# Altium PCB betterfc_v0.3.PcbDoc
Units mm, origin at the board's own origin, x right, y up, seen from the top; angles counter-clockwise.
Board outline 26 x 26 mm, 4 copper layers (Top Layer, Layer 1, Layer 2, Bottom Layer), stack 0.603 mm thick; 77 components, 53 nets, 263 pads, 0 vias.
Unrouted connection lines stored in the file: 115.
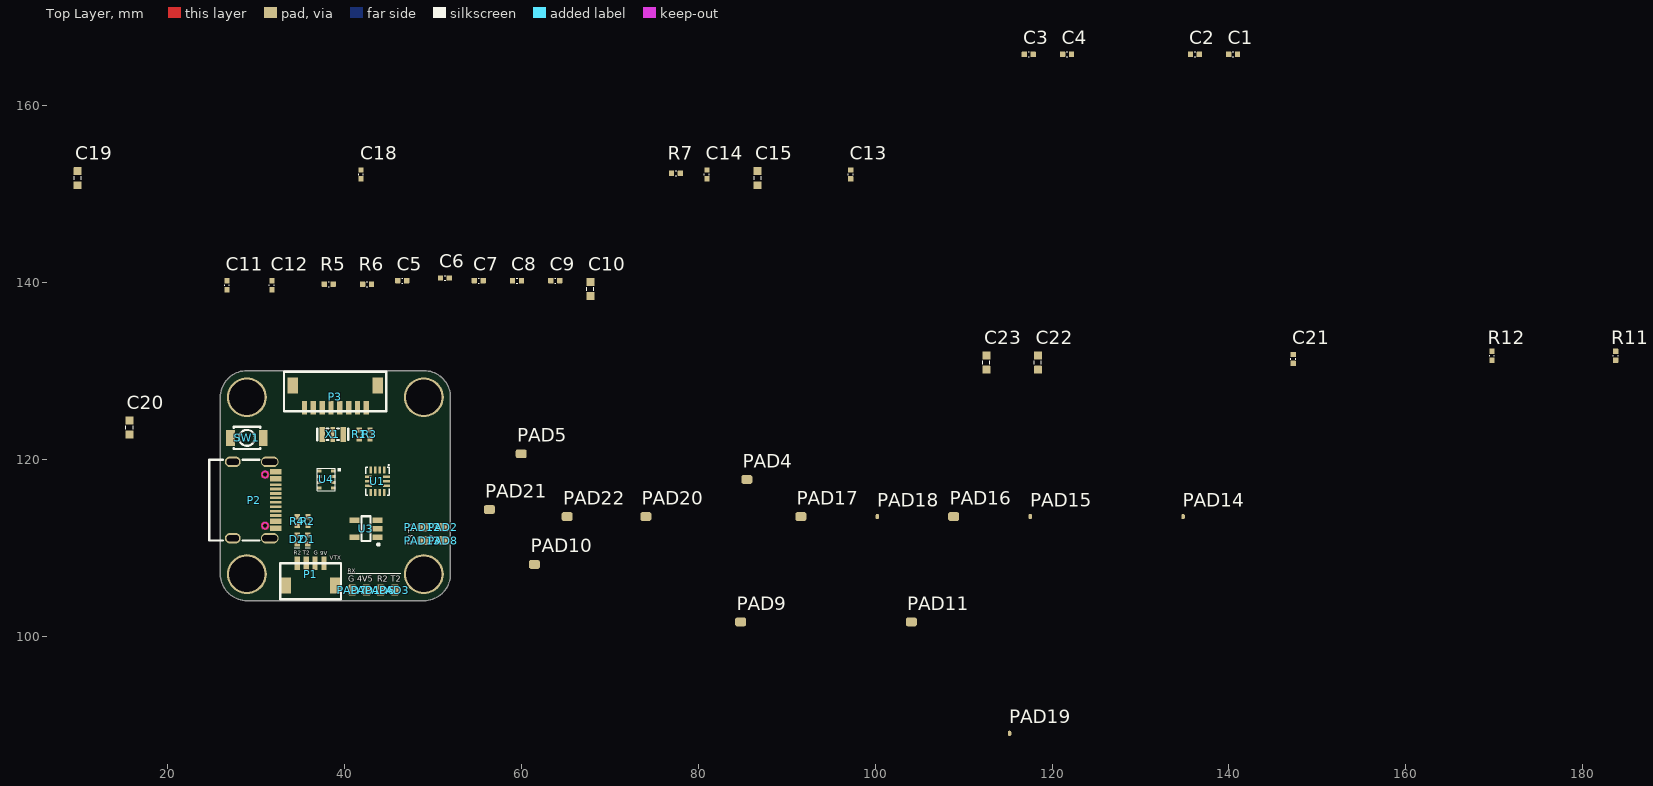
[diagram p0: Top Layer view]
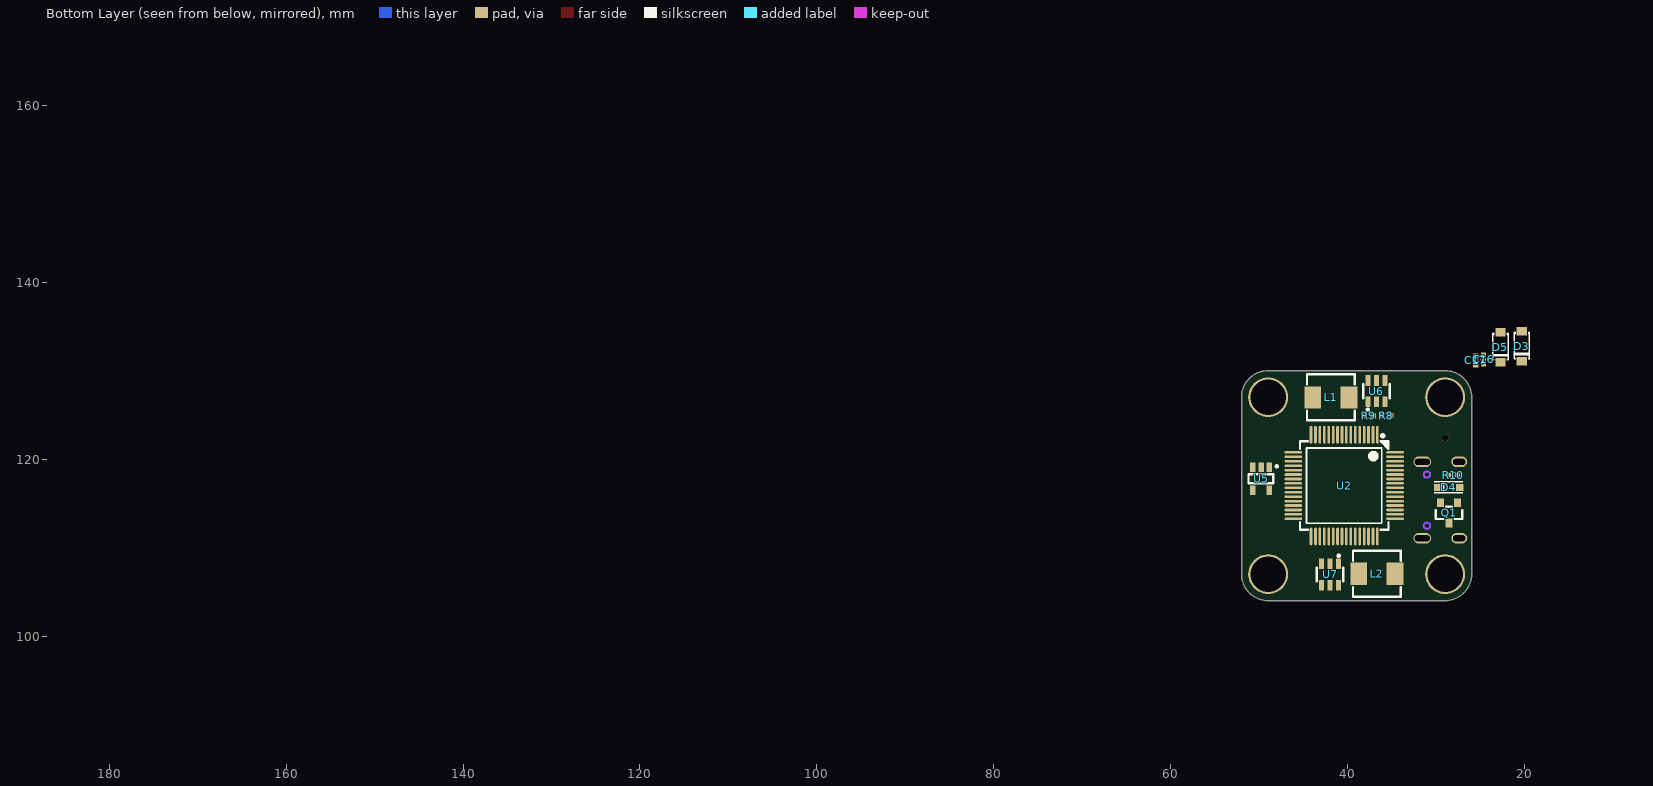
[diagram p1: Bottom Layer view, seen from below]
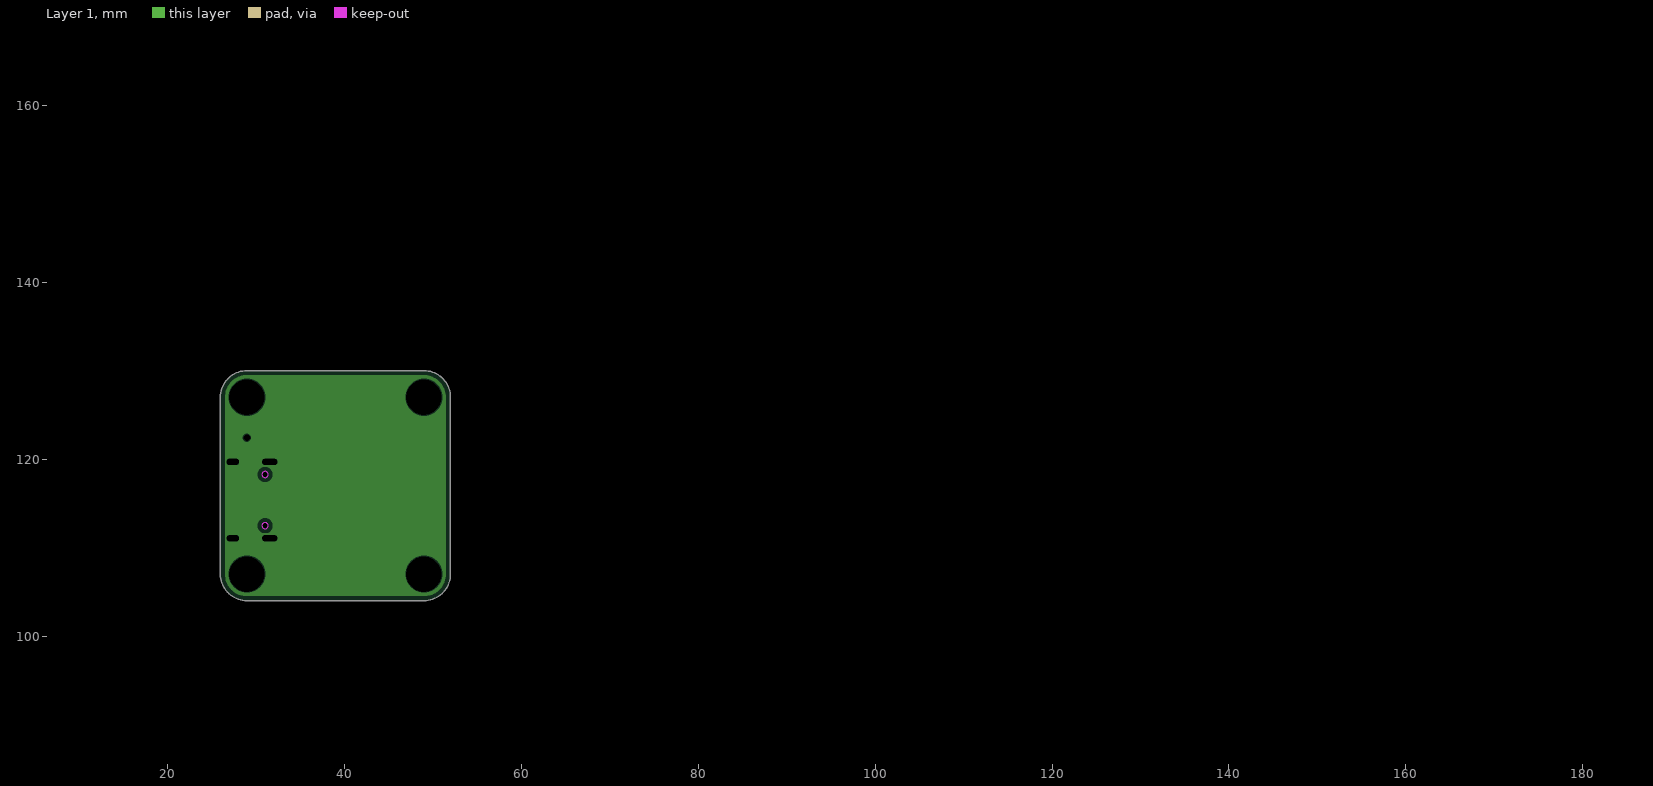
[diagram p2: Layer 1, clearances drawn from the general rule]
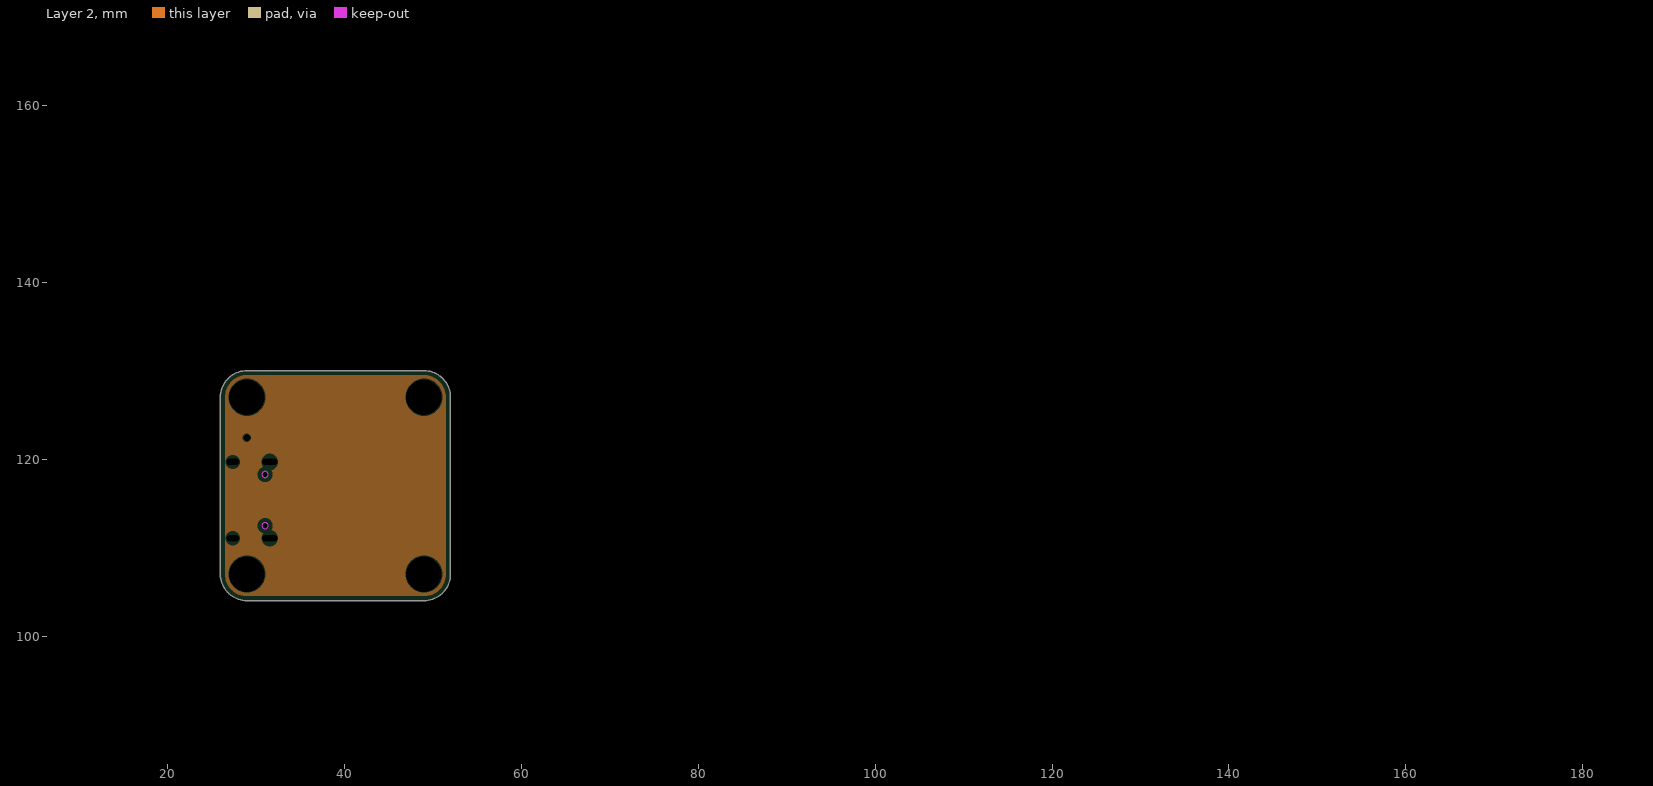
[diagram p3: Layer 2, clearances drawn from the general rule]

## Layer stack, top to bottom
Top Solder: solder mask 0.0102, Solder Resist, Dk 3.5
Top Layer: signal copper 0.0356
Dielectric 2: prepreg 0.0711, PP-006, Dk 4.1
Layer 1: plane copper 0.035, net GND
Dielectric 1: dielectric 0.32, FR-4, Dk 4.8
Layer 2: plane copper 0.035, net 3V3
Dielectric 3: prepreg 0.0711, PP-006, Dk 4.1
Bottom Layer: signal copper 0.0356
Bottom Solder: solder mask 0.0102, Solder Resist, Dk 3.5

## Board outline
29,104 cw(c29,107) 26,107 26,127 cw(c29,127) 29,130 49,130 cw(c49,127) 52,127 52,107 cw(c49,107) 49,104

## Design rules (kind name [scope] priority, off if disabled: settings)
BoardOutlineClearance [All] p1: gap=0.2 ignorepadtopadclearanceinfootprint=FALSE
Clearance [All] p1: gap=0.102 ignorepadtopadclearanceinfootprint=FALSE except(0.127: Arc-Via Track-Via SMDPad-Via THPad-Via Via-Via Via-Fill Via-Poly Via-Region Via-Text; 0.25: Arc-Hole Track-Hole SMDPad-Hole THPad-Hole Via-Hole Fill-Hole Poly-Hole Region-Hole Text-Hole)
ComponentClearance [All] p1: gap=0.102 collisioncheckmode=3 verticalgap=0.102 showdistances=TRUE
DiffPairsRouting [All] p1: maxlimit=0.102 minlimit=0.102 mostfreqgap=0.102 toplayer_minwidth=0.102 toplayer_maxwidth=1816.048 toplayer_prefwidth=0.102 bottomlayer_minwidth=0.102 bottomlayer_maxwidth=1816.048 bottomlayer_prefwidth=0.102 maxuncoupledlength=12.7
Height [All] p1: minheight=0 maxheight=1816.048 prefheight=12.7
HoleSize [All] p1: absolutevalues=TRUE maxlimit=6.3 minlimit=0.2 maxpercent=80.000 minpercent=20.000
HoleToHoleClearance [All] p1: gap=0.25 allowstackedmicrovias=FALSE
MinimumAnnularRing [All] p1: minimumring=0.076
MinimumSolderMaskSliver [All] p1: minsoldermaskwidth=0
PlaneClearance [All] p1: clearance=0.102
PlaneConnect PlaneConnectPowerPads [InPadClass('PowerPads')] p1: planeconnectstyle=Direct reliefexpansion=0.508 reliefentries=4 reliefconductorwidth=0.254 reliefairgap=0.254
PlaneConnect [All] p2: pad.planeconnectstyle=Relief pad.reliefexpansion=0.3 pad.reliefentries=4 pad.reliefconductorwidth=0.102 pad.reliefairgap=0.102 via.planeconnectstyle=Direct via.reliefexpansion=0.3 via.reliefentries=4 via.reliefconductorwidth=0.127 via.reliefairgap=0.127
PolygonConnect PolygonConnectPowerPads [All vs (InPadClass('PowerPads'))] p1: connectstyle=Direct reliefconductorwidth=0.254 reliefentries=4 polygonreliefangle="90 Angle" airgapwidth=0.254
PolygonConnect [All] p2: thpad.connectstyle=Relief thpad.reliefconductorwidth=0.102 thpad.reliefentries=4 thpad.polygonreliefangle="90 Angle" thpad.airgapwidth=0.102 smdpad.connectstyle=Relief smdpad.reliefconductorwidth=0.102 smdpad.reliefentries=4 smdpad.polygonreliefangle="90 Angle" smdpad.airgapwidth=0.102 via.connectstyle=Direct via.reliefconductorwidth=0.127 via.reliefentries=4 via.polygonreliefangle="90 Angle" via.airgapwidth=0.127
RoutingVias [All] p1: holewidth=0.2 width=0.45 viastyle="Through Hole" minholewidth=0.2 minwidth=0.45 maxholewidth=6.3 maxwidth=6.55
SilkToSilkClearance [All] p1: silktosilkclearance=0
SilkToSolderMaskClearance [IsPad] p1: minsilkscreentomaskgap=0.102 clearancetoexposedcopper=TRUE
SolderMaskExpansion [All] p1: expansion=0.075 istentingtop=FALSE
Width [All] p1: maxlimit=1816.048 minlimit=0.155 preferedwidth=0.155 minimp=50.000000 maximp=50.000000 favimp=50.000000
20 further rules are at their usual default settings.

## Components (designator, comment, footprint, x,y, rotation, side; value= is the part's Value field where it differs from the comment)
C1 "100nF" 0402_CAP 139.973,165.756 r0 top
C2 "100nF" 0402_CAP 135.648,165.756 r0 top
C3 "1uF (X7R)" 0402_CAP 116.872,165.756 r0 top
C4 "1uF (X7R)" 0402_CAP 121.197,165.756 r0 top
C5 "100nF" 0402_CAP 46.05,140.175 r0 top
C6 "100nF" 0402_CAP 50.875,140.475 r0 top
C7 "100nF" 0402_CAP 54.7,140.175 r0 top
C8 "100nF" 0402_CAP 59.026,140.175 r0 top
C9 "100nF" 0402_CAP 63.351,140.175 r0 top
C10 "4.7uF" 0603_CAP 67.826,138.425 r90 top
C11 "100nF" 0402_CAP 26.749,139.15 r90 top
C12 "100nF" 0402_CAP 31.824,139.15 r90 top
C13 "100nF" 0402_CAP 97.244,151.681 r90 top
C14 "1uF" 0402_CAP 80.993,151.681 r90 top
C15 "2.2uF" 0603_CAP 86.719,150.956 r90 top
C16 "1uF (X7R)" 0402_CAP 24.65,131.775 r270 bottom
C17 "1uF (X7R)" 0402_CAP 25.525,131.65 r270 bottom
C18 "100nF" 0402_CAP 41.891,151.681 r90 top
C19 "22uF" 0603_CAP 9.865,150.956 r90 top
C20 "10uF" 0603_CAP 15.725,122.775 r90 top
C21 "100nF" 0402_CAP 147.259,130.831 r90 top
C22 "22uF" 0603_CAP 118.408,130.106 r90 top
C23 "10uF" 0603_CAP 112.583,130.106 r90 top
D1 "LED1 (Blue - Status)" 0402_LED 35.425,111.825 r270 top
D2 "LED2 (Red - PWR)" 0402_LED 34.225,111.825 r270 top
D3 "B5819W_C305445" scottydiode 20.25,132.4 r270 bottom
D4 "Zenerdiode" Zenerdiode 27.325,116.8 r0 bottom
D5 "B5819W_C305445" scottydiode 22.675,132.275 r270 bottom
L1 "10uH" coil 42.075,127.425 r0 bottom
L2 "10uH" coil 36.525,106.6 r180 bottom
P1 "VTXplug" VTXplug 31.001,104.796 r180 top locked
P2 "USB-C" USB-C_1 24.608,120.286 r270 top
P3 "ESCplug" ESCplug 38.516,125.8 r0 top locked
PAD1 "BTR_PAD" PAD_1_1.25 42.5,105.2 r180 top
PAD2 "BTR_PAD" PAD_1_1.25 51.2,112.3 r90 top
PAD3 "BTR_PAD" PAD_1_1.25 45.7,105.2 r180 top
PAD4 "BTR_PAD" PAD_1_1.25 85.5,117.7 r90 top
PAD5 "BTR_PAD" PAD_1_1.25 60,120.6 r90 top
PAD6 "BTR_PAD" PAD_1_1.25 44.1,105.2 r180 top
PAD7 "BTR_PAD" PAD_1_1.25 40.9,105.2 r180 top
PAD8 "BTR_PAD" PAD_1_1.25 51.2,110.8 r90 top
PAD9 "BTR_PAD" PAD_1_1.25 84.8,101.6 r90 top
PAD10 "BTR_PAD" PAD_1_1.25 61.5,108.1 r90 top
PAD11 "BTR_PAD" PAD_1_1.25 104.1,101.6 r90 top
PAD12 "BTR_PAD" PAD_1_1.25 48.9,112.3 r90 top
PAD13 "BTR_PAD" PAD_1_1.25 48.9,110.8 r90 top
PAD14 "BTR_PAD" PAD_0.6_0.4 134.813,113.505 r90 top
PAD15 "BTR_PAD" PAD_0.6_0.4 117.537,113.505 r90 top
PAD16 "BTR_PAD" PAD_1_1.25 108.887,113.505 r90 top
PAD17 "BTR_PAD" PAD_1_1.25 91.611,113.505 r90 top
PAD18 "BTR_PAD" PAD_0.6_0.4 100.261,113.505 r90 top
PAD19 "BTR_PAD" PAD_0.6_0.4 115.2,89 r90 top
PAD20 "BTR_PAD" PAD_1_1.25 74.085,113.505 r90 top
PAD21 "BTR_PAD" PAD_1_1.25 56.4,114.3 r90 top
PAD22 "BTR_PAD" PAD_1_1.25 65.184,113.505 r90 top
Q1 "mosfet" mosfet 28.575,114.175 r90 bottom
R1 "10k" 0402_RES 41.85,121.5 r90 top
R2 "150" 0402_RES 35.75,114.3 r270 top
R3 "1k" 0402_RES 42.75,124.1 r270 top
R4 "150" 0402_RES 34.55,114.3 r270 top
R5 "1k" 0402_RES 36.95,139.625 r0 top
R6 "1k" 0402_RES 41.275,139.625 r0 top
R7 "10k" 0402_RES 76.193,152.156 r0 top
R8 "30k" 0402_RES 36.925,124.775 r180 bottom
R9 "157k" 0402_RES 36.3,125.05 r0 bottom
R10 "100k" 0402_RES 29.35,118.05 r180 bottom
R11 "20k" 0402_RES 183.861,130.381 r90 top
R12 "249k" 0402_RES 169.885,130.381 r90 top
SW1 "button" button 32.746,122.166 r0 top
U1 "BMI270" bmi270 43.85,117.125 r90 top
U2 "stm32f722" STM32F722RET6 40,116.9 r0 bottom locked
U3 "AP2112K-3.3TRG1" LDO 42.275,112 r0 top
U4 "bmp280" bmp280 37.975,117.7 r0 top
U5 "AP2112K-3.3TRG1" LDO 49.675,117.6 r90 bottom
U6 "AP63200WU-7" AP63205WU-7 36.825,127.55 r180 bottom
U7 "AP63200WU-7" AP63205WU-7 41.925,107.1 r0 bottom
X1 "8Mhz" crystal 38.725,121.315 r0 top

## Footprints (in the part's own frame and the unit in brackets; to place one, negate y for a bottom-side part, rotate by r counter-clockwise, add the part's x,y. Pads: shape width x height; smd on the part's side, far side on the other; paste and mask are expansions set on the pad)
0402_CAP [mm]
  rrect15% 0.6x0.6 smd: 1(0,0) 2(1,0)
  silkscreen extent 0.43,-0.28 0.58,0.28, body extent -0.01,-0.25 1.01,0.25, height 0.52
0402_LED [mm]
  rrect15% 0.6x0.6 smd: 1(0.4,0.45) 2(1.4,0.45)
  silkscreen extent 0.85,0.15 1.85,0.75, body extent 0.4,0.2 1.4,0.7, height 0.35
0402_RES [mm]
  rrect15% 0.6x0.6 smd: 1(0.8,0.15) 2(1.8,0.15)
  silkscreen extent 1.23,-0.13 1.38,0.43, body extent 0.8,-0.1 1.8,0.4, height 0.3
0603_CAP [mm]
  rrect10% 0.9x0.9 smd: 1(0,0) 2(1.6,0)
  silkscreen extent 0.6,-0.4 1,0.4, body extent 0,-0.4 1.6,0.4, height 0.9
AP63205WU-7 [mm]
  rect 0.55x1.2 smd paste+0 mask+0.051: 1(-0.877,-1.061) 2(0.073,-1.061) 3(1.022,-1.061) 4(1.022,1.339) 5(0.073,1.339) 6(-0.877,1.339)
  silkscreen extent -1.43,-2.11 1.57,0.94, body extent -1.38,-1.28 1.52,1.54, height 1
bmi270 [mm]
  rect 0.8x0.27 smd paste+0 mask+0.051: 1(1.65,-0.65) 2(1.65,-0.15) 3(1.65,0.35) 4(1.65,0.85) 8(-0.9,0.85) 9(-0.9,0.35) 10(-0.9,-0.15) 11(-0.9,-0.65)
  rect 0.27x0.8 smd paste+0 mask+0.051: 5(0.873,1.116) 6(0.373,1.116) 7(-0.127,1.116) 12(-0.125,-0.925) 13(0.375,-0.925) 14(0.875,-0.925)
  silkscreen extent -1.2,-1.23 2.26,1.42, body extent -1.12,-1.15 1.88,1.35, height 0.85
bmp280 [mm]
  rect 0.5x0.35 smd: 1(0.8,0.975) 2(0.8,0.325) 3(0.8,-0.325) 4(0.8,-0.975) 5(-0.8,-0.975) 6(-0.8,-0.325) 7(-0.8,0.325) 8(-0.8,0.975)
  silkscreen extent -1,-1.25 1.65,1.27, body extent -0.99,-1.28 0.99,1.2, height 1
button [mm]
  rect 1x1.8 smd paste+0 mask+0.051: 1(-5.596,0.234) 2(-1.896,0.234)
  round 0.75 hole 0.75 unplated paste+0: ""(-3.746,0.234)
  silkscreen extent -5.25,-1.02 -2.25,1.48, body extent -6.25,-1.26 -1.24,1.73, height 1.93
coil [mm]
  rect 1.9x2.5 smd paste+0 mask+0.051: 1(-2.225,0.441) 2(1.875,0.441)
  silkscreen extent -2.87,-2.16 2.53,3.04, body extent -2.95,-2.15 2.6,3.05, height 1.6
crystal [mm]
  rect 0.65x1.7 smd paste+0 mask+0.051: 1(-1.225,1.485) 3(1.175,1.485)
  rect 0.5x1.7 smd paste+0 mask+0.051: 2(-0.025,1.485)
  silkscreen extent -1.78,0.82 1.73,2.15
ESCplug [mm]
  rect 0.6x1.55 smd: 1(-3.016,0) 2(-2.016,0) 3(-1.016,0) 4(-0.016,0) 5(0.984,0) 6(1.984,0) 7(2.984,0) 8(3.984,0)
  rect 1.2x1.8 smd: 9(-4.316,2.525) 10(5.284,2.525)
  silkscreen extent -5.33,-0.38 6.22,4.06, body extent -4.49,-0.75 5.51,4.2, height 2.96
LDO [mil]
  rect 43.5x24.5 smd paste+0 mask+2: 1(58.25,-32.48) 2(58.25,4.89) 3(58.25,42.3) 4(-44.11,42.3) 5(-44.11,-32.48)
  silkscreen extent -13,-70 67,60, body extent -48,-52 63,62, height 45
mosfet [mm]
  rect 1x0.8 smd paste+0 mask+0.051: 1(0.895,-0.974) 2(0.895,0.926) 3(-1.405,-0.024)
  silkscreen extent -0.96,-1.52 0.44,1.48, body extent -1.69,-1.53 1.14,1.48, height 1.2
PAD_0.6_0.4 [mm]
  oval 0.6x0.4 smd: 1(0,0)
PAD_1_1.25 [mm]
  rrect50% 1x1.25 smd: 1(0,0)
scottydiode [mm]
  rect 0.95x1.15 smd paste+0 mask+0.051: 1(-2.065,-0.074) 2(1.32,-0.074)
  silkscreen extent -1.95,-0.94 1.03,0.79
STM32F722RET6 [mm]
  oval 0.3x2 smd paste+0 mask+0.051: 1(-3.35,-5.858) 2(-2.85,-5.858) 3(-2.35,-5.858) 4(-1.85,-5.858) 5(-1.35,-5.858) 6(-0.85,-5.858) 7(-0.35,-5.858) 8(0.15,-5.858) 9(0.65,-5.858) 10(1.15,-5.858) 11(1.65,-5.858) 12(2.15,-5.858) 13(2.65,-5.858) 14(3.15,-5.858) 15(3.65,-5.858) 16(4.15,-5.858) 33(4.15,5.642) 34(3.65,5.642) 35(3.15,5.642) 36(2.65,5.642) 37(2.15,5.642) 38(1.65,5.642) 39(1.15,5.642) 40(0.65,5.642) 41(0.15,5.642) 42(-0.35,5.642) 43(-0.85,5.642) 44(-1.35,5.642) 45(-1.85,5.642) 46(-2.35,5.642) 47(-2.85,5.642) 48(-3.35,5.642)
  oval 2x0.3 smd paste+0 mask+0.051: 17(6.15,-3.858) 18(6.15,-3.358) 19(6.15,-2.858) 20(6.15,-2.358) 21(6.15,-1.858) 22(6.15,-1.358) 23(6.15,-0.858) 24(6.15,-0.358) 25(6.15,0.142) 26(6.15,0.642) 27(6.15,1.142) 28(6.15,1.642) 29(6.15,2.142) 30(6.15,2.642) 31(6.15,3.142) 32(6.15,3.642) 49(-5.35,3.642) 50(-5.35,3.142) 51(-5.35,2.642) 52(-5.35,2.142) 53(-5.35,1.642) 54(-5.35,1.142) 55(-5.35,0.642) 56(-5.35,0.142) 57(-5.35,-0.358) 58(-5.35,-0.858) 59(-5.35,-1.358) 60(-5.35,-1.858) 61(-5.35,-2.358) 62(-5.35,-2.858) 63(-5.35,-3.358) 64(-5.35,-3.858)
  silkscreen extent -4.6,-5.9 5.4,4.89, body extent -5.6,-6.12 6.41,5.9, height 1.6
USB-C_1 [mm]
  oval 1.2x2 hole 0.7 slot 1.7 at 90 deg paste+0 mask+0.051: 1(0.596,6.972) 2(9.236,6.972)
  oval 1.2x1.8 hole 0.7 slot 1.4 at 90 deg paste+0 mask+0.051: 3(0.596,2.792) 4(9.236,2.792)
  rect 0.3x1.3 smd paste-100 mask+0.05: A1(1.566,7.622) A4(2.366,7.622) A5(3.666,7.622) A6(4.666,7.622) A7(5.166,7.622) A8(6.166,7.622) A9(7.466,7.622) A12(8.266,7.622) B1(7.966,7.622) B4(7.166,7.622) B5(6.666,7.622) B6(5.666,7.622) B7(4.166,7.622) B8(3.166,7.622) B9(2.666,7.622) B12(1.866,7.622)
  Keep-Out Layer board cut-out: 2.376,6.442 2.341,6.594 2.244,6.716 2.104,6.783 1.948,6.783 1.808,6.716 1.711,6.594 1.676,6.442 1.676,6.442 1.711,6.29 1.808,6.168 1.948,6.101 2.104,6.101 2.244,6.168 2.341,6.29 2.376,6.442
  Keep-Out Layer board cut-out: 8.156,6.442 8.121,6.594 8.024,6.716 7.884,6.783 7.728,6.783 7.588,6.716 7.491,6.594 7.456,6.442 7.456,6.442 7.491,6.29 7.588,6.168 7.728,6.101 7.884,6.101 8.024,6.168 8.121,6.29 8.156,6.442
  Multi-Layer circle w0.254: c7.806,6.442 r0.35
  Multi-Layer circle w0.254: c2.026,6.442 r0.35
  silkscreen extent 0.34,0.13 9.49,5.78, body extent 0.31,-0.05 9.51,7.9, height 3.2
VTXplug [mm]
  rect 0.6x1.55 smd: 1(-6.699,-3.429) 2(-5.699,-3.429) 3(-4.699,-3.429) 4(-3.699,-3.429)
  rect 1.2x1.8 smd: 5(-7.999,-0.904) 6(-2.399,-0.904)
  silkscreen extent -8.64,-3.43 -1.78,0.63, body extent -8.21,-4.19 -2.21,0.76, height 2.96
Zenerdiode [mm]
  rect 0.85x0.75 smd: 1(0,0) 2(2.5,0)
  silkscreen extent -0.35,-0.63 2.88,0.63

## Part data
C1 C2 C3 C4 C5 C6 C7 C8 C9 C10 C11 C12 C13 C14 C15 C16 C17 C18 C19 C20 C21 C22 C23: library part C
D1 D2: library part LED
D3 D5: library part ScottyDiode
L1 L2: library part coil
P2: library part USB-C_1
R1 R2 R3 R4 R5 R6 R7 R8 R9 R10 R11 R12: library part R
U3 U5: library part LDO
U6 U7: library part AP63205WU-7
X1: library part Crystal

## Free pads (board coordinates)
  round 4.5 hole 4: ""(29,107) ""(29,127) ""(49,107) ""(49,127)

## Nets (pads, with @x,y where several pads share a name; then routed paths per layer and width w, separated by ;. In a path a pad name is that pad's centre, name@x,y a point inside that pad or via, vN(x,y) a via of type N, cw(c..) or ccw(c..) an arc to the next point about the centre after c; other vN are vias at no path point)
3V3: C5.1 C6.1 C7.1 C8.1 C9.1 C10.1 C11.2 C12.1 C13.2 C17.2 R5.2 R6.2 SW1.1 U2.1 U2.13 U2.19 U2.32 U2.48 U2.64 U4.2 U4.6 U4.8 U5.5
3V3_IMU: C1.1 C2.2 C4.2 U1.5 U1.8 U3.5
4V5: C3.2 C16.2 D3.2 D5.2 PAD1.1 R4.1 U3.1 U5.1
5V: C19.2 D5.1 L1.2 PAD2.1 PAD4.1 R9.2 U3.3 U5.3
9V: C22.2 L2.2 P1.1 PAD5.1 R12.2
GND: C1.2 C2.1 C3.1 C4.1 C5.2 C6.2 C7.2 C8.2 C9.2 C10.2 C11.1 C12.2 C13.1 C14.1 C15.1 C16.1 C17.1 C19.1 C20.1 C22.1 C23.1 D1.2 D2.2 P1.2 P2.1 P2.2 P2.3 P2.4 P2.A1 P2.B1 P2.B12 P3.1 PAD7.1 PAD8.1 PAD9.1 PAD10.1 R3.1 R7.1 R8.2 R10.1 R11.2 U1.6 U1.7 U2.12 U2.18 U2.31 U2.47 U2.63 U3.2 U4.1 U4.5 U4.7 U5.2 U6.4 U7.4 X1.2
NetC14_2: C14.2 U2.7
NetC15_2: C15.2 U2.30
NetC18_1: C18.1 L1.1 U6.5
NetC18_2: C18.2 U6.6
NetC21_1: C21.1 L2.1 U7.5
NetC21_2: C21.2 U7.6
NetD1_1: D1.1 R2.2
NetD2_1: D2.1 R4.2
NetD4_1: D4.1 Q1.1 R10.2
NetP1_3: P1.3 U2.58
NetP1_4: P1.4 U2.59
NetP2_A6: P2.A6 P2.B6 U2.45
NetP2_A7: P2.A7 P2.B7 U2.44
NetP3_3: P3.3 U2.42
NetP3_4: P3.4 U2.41
NetP3_5: P3.5 U2.40
NetP3_6: P3.6 U2.39
NetP3_7: P3.7 U2.10
NetP3_8: P3.8 U2.15
NetPAD3_1: PAD3.1 U2.16
NetPAD6_1: PAD6.1 U2.17
NetPAD12_1: PAD12.1 U2.28
NetPAD13_1: PAD13.1 U2.29
NetPAD14_1: PAD14.1 U2.46
NetPAD15_1: PAD15.1 U2.49
NetPAD16_1: PAD16.1 U2.53
NetPAD17_1: PAD17.1 U2.54
NetPAD18_1: PAD18.1 R5.1 U2.61 U4.3
NetPAD19_1: PAD19.1 R6.1 U2.62 U4.4
NetPAD20_1: PAD20.1 U2.37
NetPAD21_1: PAD21.1 U2.38
NetPAD22_1: PAD22.1 U2.50
NetR1_1: R1.1 R3.2 U2.8
NetR2_1: R2.1 U2.4
NetR7_2: R7.2 SW1.2 U2.60
NetR8_1: R8.1 R9.1 U6.1
NetR11_1: R11.1 R12.1 U7.1
NetU1_1: U1.1 U2.22
NetU1_4: U1.4 U2.24
NetU1_12: U1.12 U2.27
NetU1_13: U1.13 U2.21
NetU1_14: U1.14 U2.23
NetU2_5: U2.5 X1.1
NetU2_6: U2.6 X1.3
USB_VBUS: D3.1 P2.A4 P2.A9 P2.B4 P2.B9
VBATT: P3.2 Q1.3
VIN: C20.2 C23.2 D4.2 PAD11.1 Q1.2 R1.2 U6.2 U6.3 U7.2 U7.3
pads on no net: P1.5 P1.6 P2.A5 P2.A8 P2.A12 P2.B5 P2.B8 P3.9 P3.10 SW1. U1.2 U1.3 U1.9 U1.10 U1.11 U2.2 U2.3 U2.9 U2.11 U2.14 U2.20 U2.25 U2.26 U2.33 U2.34 U2.35 U2.36 U2.43 U2.51 U2.52 U2.55 U2.56 U2.57 U3.4 U5.4

## Polygon pours and split planes (outlines as drawn)
GND on Layer 1 (split plane): 49,129.49 49.163,129.49 49.487,129.447 49.802,129.362 50.103,129.238 50.386,129.074 50.645,128.876 50.876,128.645 51.074,128.386 51.238,128.103 51.362,127.802 51.447,127.487 51.49,127.163 51.49,127 51.49,107 51.49,106.837 51.447,106.513 51.362,106.198 51.238,105.897 51.074,105.614 50.876,105.355 50.645,105.124 50.386,104.926 50.103,104.762 49.802,104.638 49.487,104.553 49.163,104.51 49,104.51 29,104.51 28.837,104.51 28.513,104.553 28.198,104.638 27.897,104.762 27.614,104.926 27.355,105.124 27.124,105.355 26.926,105.614 26.762,105.897 26.638,106.198 26.553,106.513 26.51,106.837 26.51,107 26.51,127 26.51,127.163 26.553,127.487 26.638,127.802 26.762,128.103 26.926,128.386 27.124,128.645 27.355,128.876 27.614,129.074 27.897,129.238 28.198,129.362 28.513,129.447 28.837,129.49 29,129.49
3V3 on Layer 2 (split plane): 49,129.49 49.163,129.49 49.487,129.447 49.802,129.362 50.103,129.238 50.386,129.074 50.645,128.876 50.876,128.645 51.074,128.386 51.238,128.103 51.362,127.802 51.447,127.487 51.49,127.163 51.49,127 51.49,107 51.49,106.837 51.447,106.513 51.362,106.198 51.238,105.897 51.074,105.614 50.876,105.355 50.645,105.124 50.386,104.926 50.103,104.762 49.802,104.638 49.487,104.553 49.163,104.51 49,104.51 29,104.51 28.837,104.51 28.513,104.553 28.198,104.638 27.897,104.762 27.614,104.926 27.355,105.124 27.124,105.355 26.926,105.614 26.762,105.897 26.638,106.198 26.553,106.513 26.51,106.837 26.51,107 26.51,127 26.51,127.163 26.553,127.487 26.638,127.802 26.762,128.103 26.926,128.386 27.124,128.645 27.355,128.876 27.614,129.074 27.897,129.238 28.198,129.362 28.513,129.447 28.837,129.49 29,129.49

## Silkscreen, mask and mechanical layers (free items; w line width, h text height)
Top Overlay:
  lines w0.075: 40.4,107.1 46.4,107.1
  text "G" at 50.35,112.05 h0.65 r90
  text "T3" at 47.9,111.608 h0.65 r90
  text "R3" at 47.85,110.25 h0.65 r90
  text "5V" at 50.35,110.25 h0.65 r90
  text "R2" at 34.3,109.175 h0.45
  text "T2" at 35.325,109.175 h0.45
  text "G" at 36.525,109.175 h0.45
  text "9V" at 37.275,109.15 h0.45
  text "VTX" at 38.35,108.6 h0.45
  text "RX" at 40.421,107.173 h0.45
  text "G" at 40.45,106.15 h0.65
  text "4V5" at 41.45,106.15 h0.65
  text "R2" at 43.75,106.15 h0.65
  text "T2" at 45.25,106.15 h0.65